# Altium PCB UNO.PcbDoc
Units mil, origin at the board's own origin, x right, y up, seen from the top; angles counter-clockwise.
Board outline 6000 x 4000 mil, 2 copper layers (Top Layer, Bottom Layer), stack 12.8 mil thick; 53 components, 47 nets, 230 pads, 39 vias.
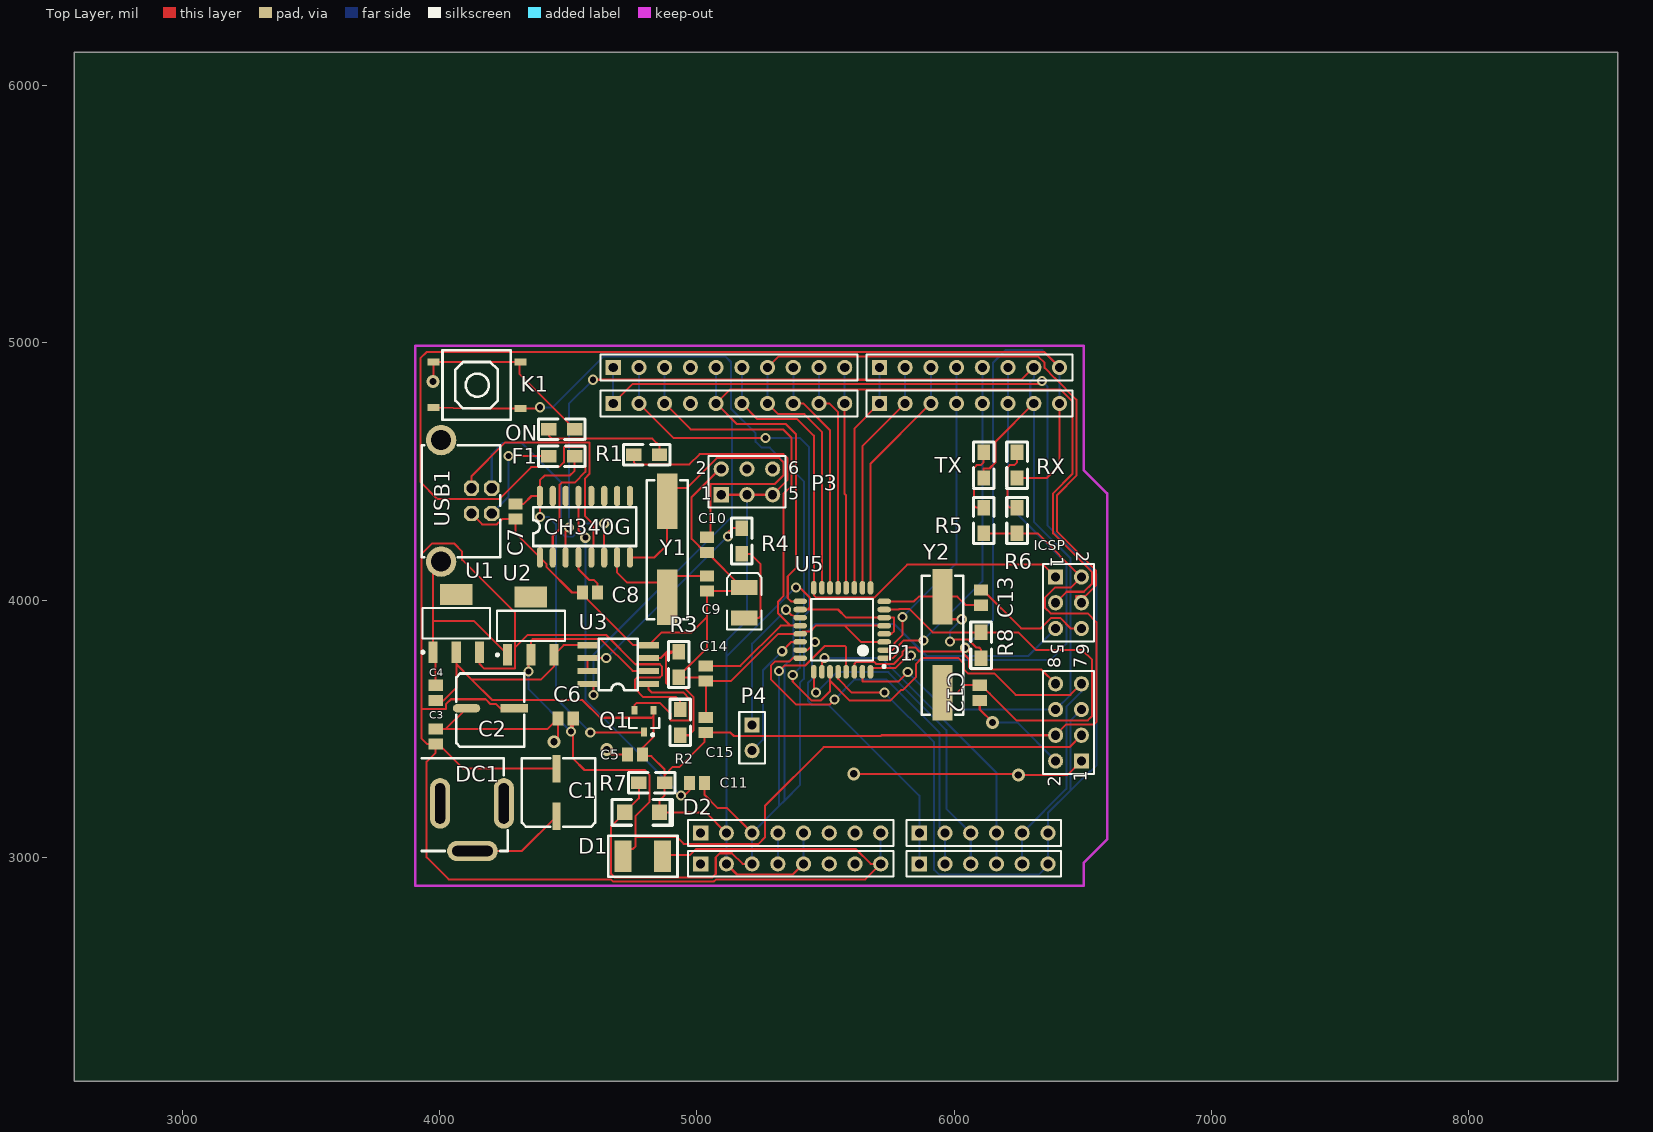
[diagram p0: Top Layer view]
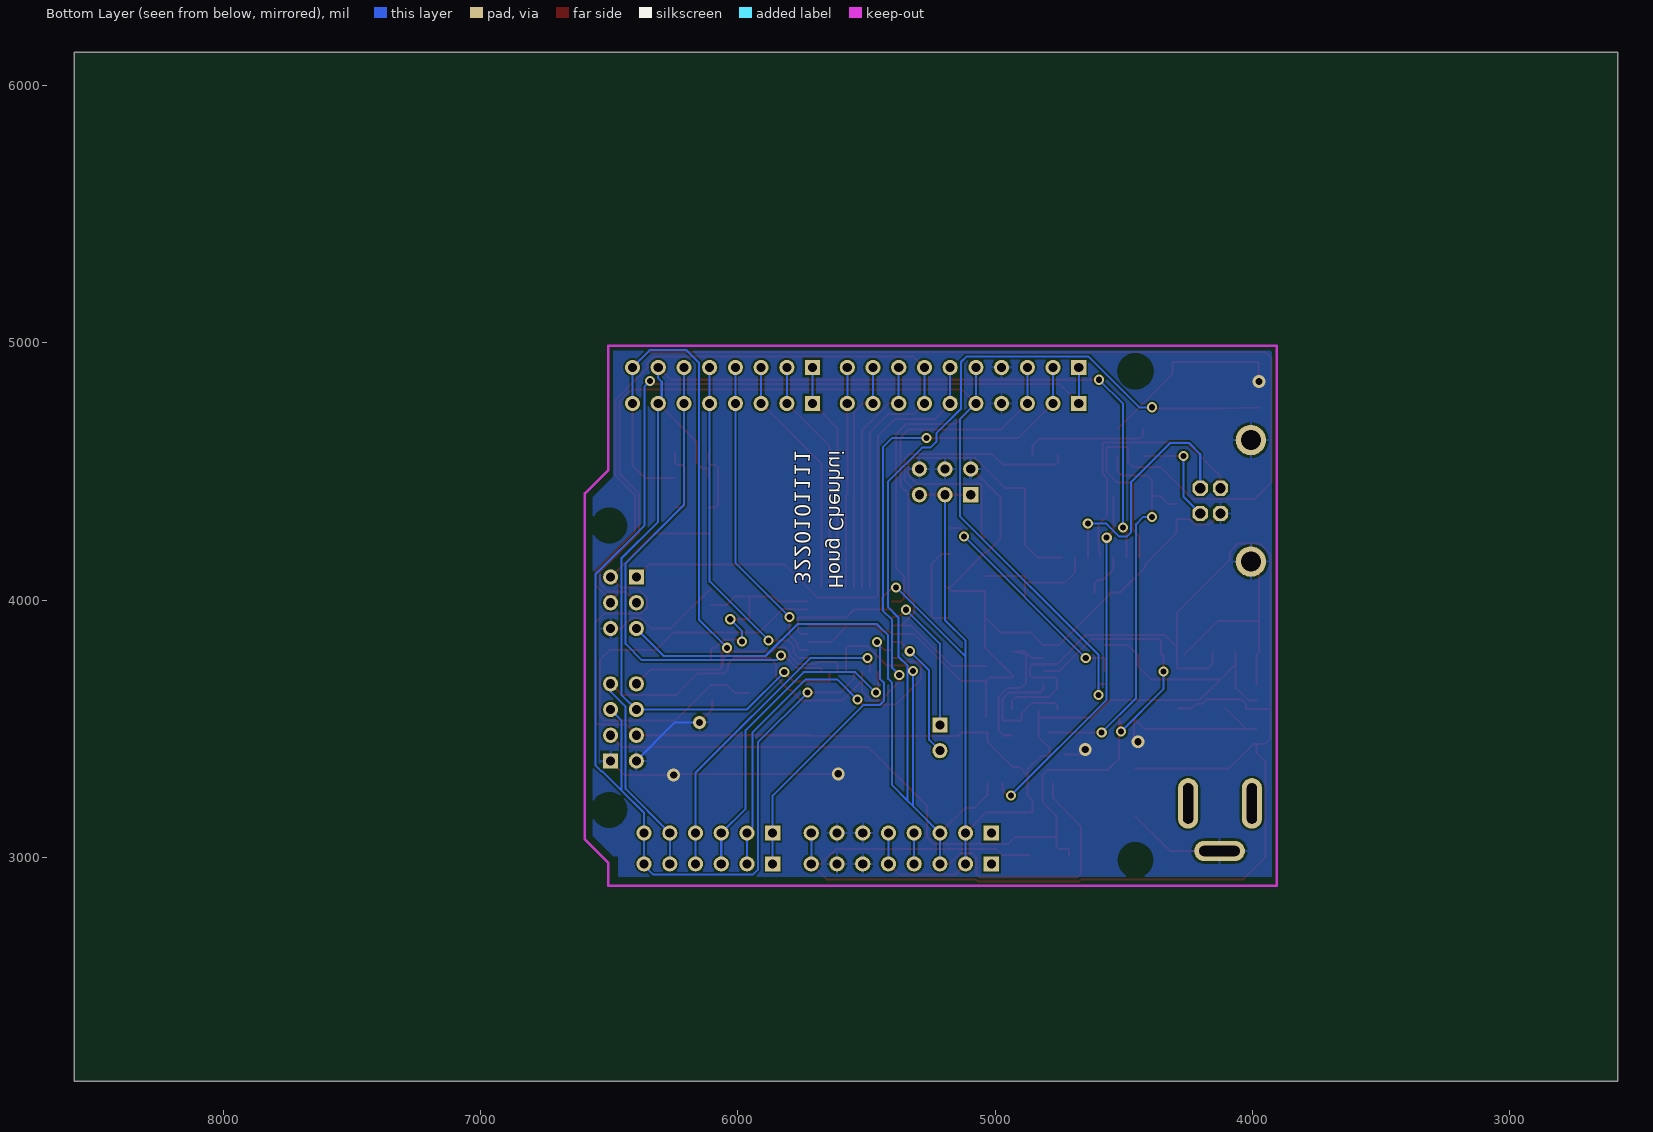
[diagram p1: Bottom Layer view, seen from below]

## Layer stack, top to bottom
Top Solder: solder mask 0.4, Solder Resist, Dk 3.5
Top Layer: signal copper 1.4
Dielectric1: core 10, FR-4, Dk 4.2
Bottom Layer: signal copper 1.4
Bottom Solder: solder mask 0.4, Solder Resist, Dk 3.5

## Board outline
2580,2130 2580,6130 8580,6130 8580,2130

## Design rules (kind name [scope] priority, off if disabled: settings)
AssemblyTestPointUsage AssemblyTestPointUsage_1 [All] p2:
AssemblyTestpoint AssemblyTestpoint_1 [All] p2: testpointundercomponent=TRUE minsize=40 maxsize=100 preferedsize=60 minholesize=0 maxholesize=40 preferedholesize=32 testpointgrid=1 usegrid=TRUE gridtolerance=0.01 allowsidetop=TRUE allowsidebottom=TRUE
Clearance [All] p1: gap=7.87
ComponentClearance ComponentClearance_1 [All] p2: gap=10 collisioncheckmode=3 verticalgap=10 showdistances=FALSE
DiffPairsRouting DiffPairsRouting_1 [All] p2: maxlimit=10 minlimit=10 mostfreqgap=10 toplayer_minwidth=15 toplayer_maxwidth=15 toplayer_prefwidth=15 bottomlayer_minwidth=15 bottomlayer_maxwidth=15 bottomlayer_prefwidth=15 maxuncoupledlength=500
FabricationTestPointUsage TestPointUsage [All] p2: valid=0 allowmultiple=FALSE
FabricationTestpoint Testpoint [All] p2: side=3 testpointundercomponent=TRUE minsize=40 maxsize=100 preferedsize=60 minholesize=0 maxholesize=40 preferedholesize=32 testpointgrid=1 allowsidetop=TRUE allowsidebottom=TRUE usegrid=TRUE gridtolerance=0.01
FanoutControl Fanout_LCC [IsLCC] p1: bgadir=Out bgaviamode=Centered fanoutstyle=Auto fanoutdirection=Alternating viagrid=1 // Fanout_LCC (Default Rule)
FanoutControl Fanout_BGA [IsBGA] p2: bgadir=Out bgaviamode=Centered fanoutstyle=Auto fanoutdirection=Alternating viagrid=1 // Fanout_BGA (Default Rule)
FanoutControl Fanout_Default [All] p4: bgadir=Out bgaviamode=Centered fanoutstyle=Auto fanoutdirection=Alternating viagrid=1 // Fanout_Default (Default Rule)
FanoutControl Fanout_Small [(CompPinCount < 5)] p5: bgadir=Out bgaviamode=Centered fanoutstyle=Auto fanoutdirection=OutThenIn viagrid=1 // Fanout_Small (Default Rule)
FanoutControl Fanout_BGA_1 [IsBGA] p6: bgadir=Out bgaviamode=Centered fanoutstyle=Auto fanoutdirection=Alternating viagrid=1 // Fanout_BGA (Default Rule)
FanoutControl Fanout_LCC_1 [IsLCC] p7: bgadir=Out bgaviamode=Centered fanoutstyle=Auto fanoutdirection=Alternating viagrid=1 // Fanout_LCC (Default Rule)
FanoutControl Fanout_SOIC_1 [IsSOIC] p8: bgadir=Out bgaviamode=Centered fanoutstyle=Auto fanoutdirection=Alternating viagrid=1 // Fanout_SOIC (Default Rule)
FanoutControl Fanout_Small_1 [(CompPinCount < 5)] p9: bgadir=Out bgaviamode=Centered fanoutstyle=Auto fanoutdirection=OutThenIn viagrid=1 // Fanout_Small (Default Rule)
FanoutControl Fanout_Default_1 [All] p10: bgadir=Out bgaviamode=Centered fanoutstyle=Auto fanoutdirection=Alternating viagrid=1 // Fanout_Default (Default Rule)
Height Height_1 [All] p2: minheight=0 maxheight=1000 prefheight=500
HoleSize HoleSize_1 [All] p2: absolutevalues=TRUE maxlimit=100 minlimit=1 maxpercent=80.000 minpercent=20.000
HoleToHoleClearance HoleToHoleClearance_1 [All] p2: gap=10 allowstackedmicrovias=TRUE
LayerPairs LayerPairs_1 [All] p2: enforce=TRUE
MinimumSolderMaskSliver MinimumSolderMaskSliver_1 [All] p2: minsoldermaskwidth=10
NetAntennae NetAntennae_1 [All] p2: netantennaetolerance=0
PasteMaskExpansion PasteMaskExpansion_1 [All] p2: expansion=0
PlaneClearance PlaneClearance_1 [All] p2: clearance=20
PolygonConnect [All] p1: connectstyle=Relief reliefconductorwidth=10 reliefentries=4 polygonreliefangle="90 Angle" airgapwidth=10
PolygonConnect PolygonConnect_1 [All] p2: connectstyle=Relief reliefconductorwidth=10 reliefentries=4 polygonreliefangle="90 Angle" airgapwidth=10
RoutingPriority RoutingPriority_1 [All] p2: routingpriority=0
RoutingTopology RoutingTopology_1 [All] p2: topology=Shortest
RoutingVias [All] p1: holewidth=23.62 width=39.37 viastyle="Through Hole" minholewidth=28 minwidth=50 maxholewidth=28 maxwidth=50
ShortCircuit ShortCircuit_1 [All] p2: allowed=FALSE
SilkToBoardRegionClearance SilkToBoardRegionClearance_1 [All] p2:
SilkToSilkClearance SilkToSilkClearance_1 [All] p2: silktosilkclearance=10
SilkToSolderMaskClearance SilkscreenOverComponentPads [IsPad] p2: minsilkscreentomaskgap=10 clearancetoexposedcopper=TRUE
SolderMaskExpansion [All] p1: expansion=4
SolderMaskExpansion SolderMaskExpansion_1 [All] p2: expansion=4
UnRoutedNet UnRoutedNet_1 [All] p2:
UnpouredPolygon UnpouredPolygon_1 [All] p2:
Width [All] p1: maxlimit=7.87 minlimit=7.87 preferedwidth=7.87
26 further rules are at their usual default settings.

## Components (designator, comment, footprint, x,y, rotation, side; value= is the part's Value field where it differs from the comment)
C1 "25V/47uF 铝电解电容" C_47uF#1 4455,3345 r270 top
C2 "25V/47uF 铝电解电容" C_47uF#2 4290,3580 r180 top
C3 "Cap" C0805 3985,3470 r90 top
C4 "Cap" C0805 3985,3640 r90 top
C5 "Cap" C0805 4760,3400 r0 top
C6 "Cap" C0805 4490,3540 r0 top
C7 "Cap" C0805 4295,4345 r90 top
C8 "Cap" C0805 4585,4030 r0 top
C9 "Cap" C0805 5040,4065 r90 top
C10 "Cap" C0805 5040,4215 r90 top
C11 "Cap" C0805 5000.47,3290 r0 top
C12 "Cap" C0805 6100,3640 r270 top
C13 "Cap" C0805 6105,4010 r90 top
C14 "Cap" C0805 5035,3715 r90 top
C15 "Cap" C0805 5035,3515 r90 top
CH340G "CH340G" SOP-16 4390,4166.5 r90 top
D1 "M7" SMA(DO-214AC) 4790,3005 r0 top
D2 "4148" 1206 4720,3175 r0 top
DC1 "DC" DC_5.5插座 4250,3210.04 r180 top
F1 "500mA" 0805 4425,4560 r0 top
ICSP "ICSP" HDR2X3 6395,4090 r270 top
J1A "POWER" HDR1X8 5015,3095 r0 top
J1B "POWER" HDR1X8 5015,2975 r0 top
J2A "AD_IN" HDR1X6 5865,2975 r0 top
J2B "AD_IN" HDR1X6 5865,3095 r0 top
J3A "DI_PWM" HDR1X8 5710,4905 r0 top
J3B "DI_PWM" HDR1X8 5710,4765 r0 top
J4A "DI_PWM" HDR1X10 4675,4765 r0 top
J4B "DI_PWM" HDR1X10 4675,4905 r0 top
K1 "SW-PB" KEY6x6 3976.42,4926.1 r0 top
ON "RED" 0805 4425,4665 r0 top
P1 "Header 4X2" HDR2X4 6495,3375 r90 top
P3 "POWER" HDR2X3 5095,4410 r0 top
P4 "Header 2" HDR1X2 5215,3515 r270 top
Q1 "FDN340P" SOT23_L 4795,3530 r270 top
R1 "Res2" 0805 4755,4565 r0 top
R2 "Res2" 0805 4935,3475 r90 top
R3 "Res2" 0805 4930,3700 r90 top
R4 "Res2" 0805 5175,4180 r90 top
R5 "Res2" 0805 6115,4360 r270 top
R6 "Res2" 0805 6245,4360 r270 top
R7 "Res2" 0805 4775,3290 r0 top
R8 "Res2" 0805 6105,3775 r90 top
RX "RED" 0805 6245,4575 r270 top
TX "RED" 0805 6115,4575 r270 top
U1 "1117,5.0" SOT223_L 4065,3910 r90 top
U2 "1117,3.3" SOT223_L 4355,3900 r90 top
U3 "LM358" SOP-8 4813.11,3675 r180 top
U5 "mega 328-QFP32" 32A_L 5565,3885 r180 top
USB1 "USB" PN61729 4006,4622.44 r270 top
Y1 "12M" HC_49SMD 4885,4010.98 r90 top
Y2 "16M" HC_49SMD 5955,3640 r90 top
? "BLUE" 3.5X2.8X1.9 5185,3990 r90 top

## Footprints (in the part's own frame and the unit in brackets; to place one, negate y for a bottom-side part, rotate by r counter-clockwise, add the part's x,y. Pads: shape width x height; smd on the part's side, far side on the other; paste and mask are expansions set on the pad)
3.5X2.8X1.9 [mm] "SM LED; 2 C-Bend Leads; Body 3.5 x 2.8 x 1.9 mm, inc leads (LxWxH typ)"
  rect 1.5x2.6 smd: 1(-1.5,0) 2(1.5,0)
  silkscreen extent -2.65,-1.7 2.95,1.7
32A_L [mm] "32-Pin Thin Quad Flat Pack 0.8 mm Pitch, IPC High Density"
  oval 1.35x0.55 smd: 1(-4.15,2.8) 2(-4.15,2) 3(-4.15,1.2) 4(-4.15,0.4) 5(-4.15,-0.4) 6(-4.15,-1.2) 7(-4.15,-2) 8(-4.15,-2.8) 17(4.15,-2.8) 18(4.15,-2) 19(4.15,-1.2) 20(4.15,-0.4) 21(4.15,0.4) 22(4.15,1.2) 23(4.15,2) 24(4.15,2.8)
  oval 0.55x1.35 smd: 9(-2.8,-4.15) 10(-2,-4.15) 11(-1.2,-4.15) 12(-0.4,-4.15) 13(0.4,-4.15) 14(1.2,-4.15) 15(2,-4.15) 16(2.8,-4.15) 25(2.8,4.15) 26(2,4.15) 27(1.2,4.15) 28(0.4,4.15) 29(-0.4,4.15) 30(-1.2,4.15) 31(-2,4.15) 32(-2.8,4.15)
  silkscreen extent -4.28,-3.05 3.05,3.75, body extent -3.5,-3.5 3.5,3.5, height 1.2
0805 [mil]
  rect 60x49.21 smd: 1(0,0) 2(100,0)
  silkscreen extent -40,-40 140,40
1206 [mil]
  rect 60x60 smd: 1(0,0) 2(135,0)
  silkscreen extent -50,-50 185,50
C0805 [mm] "Chip Capacitor, Body 2.0x1.3mm, IPC High Density"
  rect 1.1x1.4 smd: 1(-0.75,0) 2(0.75,0)
  body extent -1.1,-0.72 1.1,0.72, height 1.4
C_47uF#1 [mm]
  rect 2.7x0.8 smd: 0(0,0) 1(4.699,0)
  silkscreen extent -1.02,-3.43 5.72,3.81
C_47uF#2 [mm]
  rect 2.7x0.8 smd: 0(0,0)
  oval 2.7x0.8 smd: 1(4.699,0)
  silkscreen extent -1.02,-3.43 5.72,3.81
DC_5.5插座 [mm]
  oval 2x5 hole 1 slot 4 at 90 deg: 0(0,0) 1(6.3,0)
  oval 5x2 hole 1 slot 4 at 0 deg: 2(3.1,4.7)
  silkscreen extent -0.38,-4.44 8.13,4.7
HC_49SMD [mm]
  rect 5.5x2 smd: 0(0,0) 1(9.5,0)
  silkscreen extent -2.16,-2.03 11.56,2.03
HDR1X2 [mm] "Connector; Header; 2 Position"
  rect 1.5x1.5 hole 0.9: 1(0,0)
  round 1.5 hole 0.9: 2(2.54,0)
  silkscreen extent -1.27,-1.27 3.81,1.27
HDR1X6 [mm] "Connector; Header; 6 Position"
  rect 1.5x1.5 hole 0.9: 1(0,0)
  round 1.5 hole 0.9: 2(2.54,0) 3(5.08,0) 4(7.62,0) 5(10.16,0) 6(12.7,0)
  silkscreen extent -1.27,-1.27 13.97,1.27
HDR1X8 [mm] "Connector; Header; 8 Position"
  rect 1.5x1.5 hole 0.9: 1(0,0)
  round 1.5 hole 0.9: 2(2.54,0) 3(5.08,0) 4(7.62,0) 5(10.16,0) 6(12.7,0) 7(15.24,0) 8(17.78,0)
  silkscreen extent -1.27,-1.27 19.05,1.27
HDR1X10 [mm] "Connector; Header; 10 Position"
  rect 1.5x1.5 hole 0.9: 1(0,0)
  round 1.5 hole 0.9: 2(2.54,0) 3(5.08,0) 4(7.62,0) 5(10.16,0) 6(12.7,0) 7(15.24,0) 8(17.78,0) 9(20.32,0) 10(22.86,0)
  silkscreen extent -1.27,-1.27 24.13,1.27
HDR2X3 [mm] "Connector; Header; 3x2 Position"
  rect 1.5x1.5 hole 0.9: 1(0,0)
  round 1.5 hole 0.9: 2(0,2.54) 3(2.54,0) 4(2.54,2.54) 5(5.08,0) 6(5.08,2.54)
  silkscreen extent -1.27,-1.27 6.35,3.81
HDR2X4 [mm] "Connector; Header; 4x2 Position"
  rect 1.5x1.5 hole 0.9: 1(0,0)
  round 1.5 hole 0.9: 2(0,2.54) 3(2.54,0) 4(2.54,2.54) 5(5.08,0) 6(5.08,2.54) 7(7.62,0) 8(7.62,2.54)
  silkscreen extent -1.27,-1.27 8.89,3.81
KEY6x6 [mm]
  rect 1.2x0.7 smd: 4(0,0) 5(8.6,0) 6(0,-4.5) 7(8.6,-4.6)
  silkscreen extent 0.89,-5.71 7.62,1.14
PN61729 [mm]
  round 3 hole 2: 8(0,0) 9(12,0)
  oct 1.524x1.524 hole 1: 10(4.75,3) 11(7.25,3) 12(4.75,5) 13(7.25,5)
  silkscreen extent 0.51,-1.91 11.56,5.84
SMA(DO-214AC) [mil]
  rect 65.75x122.44 smd: A(-77.36,0) K(77.36,0)
  silkscreen extent -135,-80 135,80
SOP-8 [mm]
  rect 2x0.6 smd: 1(0,0) 2(0,-1.27) 3(0,-2.54) 4(0,-3.81) 5(6.048,-3.81) 6(6.048,-2.54) 7(6.048,-1.27) 8(6.048,0)
  silkscreen extent 1.1,-4.44 4.94,0.64
SOP-16 [mil]
  oval 80x24 smd: 1(0,0) 2(0,-50) 3(0,-100) 4(0,-150) 5(0,-200) 6(0,-250) 7(0,-300) 8(0,-350) 9(238.5,-350) 10(238.5,-300) 11(238.5,-250) 12(238.5,-200) 13(238.5,-150) 14(238.5,-100) 15(238.5,-50) 16(238.5,0)
  silkscreen extent 44,-375 194,25
SOT23_L [mm] "SOT23, 3-Leads, Body 2.9x1.3mm, Pitch 0.95mm, Lead Span 2.3mm - Reverse Pinning, IPC High Density"
  rect 0.85x0.6 smd: 1(1.075,0) 2(-1.075,-0.95) 3(-1.075,0.95)
  silkscreen extent -0.3,-1.5 1.47,1.5, body extent -0.7,-1.5 0.7,1.5, height 1.1
SOT223_L [mm] "SOT223, 4-Leads, Body 6.5x3.5mm, Pitch 2.3mm, Lead Span 7mm, IPC High Density"
  rect 2.1x0.9 smd: 1(-2.85,2.3) 2(-2.85,0) 3(-2.85,-2.3)
  rect 2.1x3.2 smd: 4(2.85,0)
  silkscreen extent -2.97,-3.35 1.5,3.42, body extent -1.85,-3.35 1.85,3.35, height 1.7

## Part data
C1 C2: library part "Cap Pol1", "Polarized Capacitor (Radial)"
C3 C4 C5 C6 C7 C8 C9 C10 C11 C12 C13 C14 C15: "Capacitor"
D1 D2: library part "Diode 1N4148", "High Conductance Fast Diode"
F1: library part "Fuse 1", "Fuse"
J1A J1B J3A J3B: library part MHDR1X8, "Header, 8-Pin"
J2A J2B: library part MHDR1X6, "Header, 6-Pin"
J4A J4B: library part MHDR1X10, "Header, 10-Pin"
K1: "Switch"
ON RX TX: library part LED2, "Typical RED, GREEN, YELLOW, AMBER GaAs LED"
P1: "Header, 4-Pin, Dual row"
P4: "Header, 2-Pin"
Q1: library part MOSFET-P, "P-Channel MOSFET"
R1 R2 R3 R4 R5 R6 R7 R8: "Resistor"
U1 U2: library part LM1117
U5: library part QFP-32
Y1 Y2: library part XTAL, "Crystal Oscillator"
?: library part LED3, "Typical BLUE SiC LED"

## Via types
v1: diameter 39.37, hole 23.62, Top Layer to Bottom Layer, 33 vias
v2: diameter 50, hole 28, Top Layer to Bottom Layer, 6 vias

## Nets (pads, with @x,y where several pads share a name; then routed paths per layer and width w, separated by ;. In a path a pad name is that pad's centre, name@x,y a point inside that pad or via, vN(x,y) a via of type N, cw(c..) or ccw(c..) an arc to the next point about the centre after c; other vN are vias at no path point)
+3V3: J1A.4 J1B.4 | length 120
  Bottom Layer w7.87: J1B.4 J1A.4
A0: J2A.1 J2B.1 U5.23 | length 1160.9
  Top Layer w7.87: U5.23 5429.26,3806.26 v1(5460,3837)
  Bottom Layer w7.87: v1(5460,3837) 5448,3825 5448,3694.18 5432,3678.18 5432,3610 5449.67,3592.33 5512.5,3592.33 5865,3239.82 J2B.1 J2A.1
A1: J2A.2 J2B.2 U5.24 | length 1520.2
  Top Layer w7.87: U5.24 5373.76,3774.76 5361.24,3762.24 5305.24,3762.24 5288,3745 5288,3692 5386.24,3593.76 5515.76,3593.76 v1(5536,3614)
  Bottom Layer w7.87: v1(5536,3614) 5614,3692 5736,3692 5944,3484 5944,3116 J2B.2 J2A.2
A2: J2A.3 J2B.3 U5.25 | length 1275.9
  Top Layer w7.87: U5.25 5454.76,3650.24 v1(5464,3641)
  Bottom Layer w7.87: v1(5464,3641) 5543.24,3720.24 5744.75,3720.24 5970,3494.99 5970,3190 J2B.3 J2A.3
A3: J2A.4 J2B.4 U5.26 | length 1265.2
  Top Layer w7.87: U5.26 5486.26,3765.26 v1(5496,3775)
  Bottom Layer w7.87: v1(5496,3775) 5719,3775 6165,3329 J2B.4 J2A.4
A4/SDA: J2A.5 J2B.5 J4A.2 J4B.2 P1.7 U5.27 | length 4068.9
  Top Layer w7.87: J4A.2 4909,4631 v1(5267,4631) ; v1(5372.95,3709.68) 5372.95,3683.56 5447,3609.5 5481,3609.5 5517.76,3646.26 5517.76,3686.24 ; U5.27 5517.76,3686.24 ; P1.7 6452.09,3632.09 6239.91,3632.09 6157.85,3714.15 6056,3714.15 6038.25,3731.9 6038.25,3753.75 6016.17,3775.83 5875.54,3775.83 5851.5,3751.78 5851.5,3701 5800.91,3650.41 5793.38,3650.41 5752.47,3609.5 5594.5,3609.5 5517.76,3686.24
  Bottom Layer w7.87: J4A.2 J4B.2 ; v1(5267,4631) 5400,4631 5436.95,4594.05 5436.95,3959.7 5400.63,3923.39 5400.63,3737.36 v1(5372.95,3709.68) ; J2A.5 J2B.5 6436.34,3266.34 6436.34,3585.34 6495,3644 P1.7
A5/SCL: J2A.6 J2B.6 J4A.1 J4B.1 P1.5 U5.28 | length 5690.4
  Top Layer w7.87: J4A.1 4751,4841 6331,4841 v1(6342,4852) ; U5.28 5549.25,3693.98 5602.23,3641 v1(5729,3641)
  Bottom Layer w7.87: J4A.1 J4B.1 ; v1(5729,3641) 5923,3447 5923,2952 5942,2933 6330,2933 6365,2968 J2A.6 J2B.6 6365,3172.73 6452.09,3259.82 ; v1(6342,4852) 6363,4831 6363,4292 6553,4102 6553,3357.24 6529.42,3333.66 6525.93,3333.66 6452.09,3259.82 ; P1.5 6452.09,3532.09 6452.09,3259.82
A6: P4.1 U5.19 | length 567.4
  Top Layer w7.87: v1(5347,3963) 5368,3942 U5.19
  Bottom Layer w7.87: P4.1 5215,3831 v1(5347,3963)
A7: P4.2 U5.22 | length 519.7
  Top Layer w7.87: v1(5332,3801.76) 5368,3837.76 U5.22
  Bottom Layer w7.87: P4.2 5257,3457 5257,3726.76 v1(5332,3801.76)
AREF: C14.2 J4A.3 J4B.3 U5.20 | length 1892.4
  Top Layer w7.87: J4A.3 4976,4664 5335,4664 5368.5,4630.5 5368.5,4445.47 5337.76,4414.73 5337.76,4016.53 5315.5,3994.28 5315.5,3949.5 5364.25,3900.75 ; C14.2 5169.53,3744.53 5325.75,3900.75 5364.25,3900.75 ; U5.20 5364.25,3900.75
  Bottom Layer w7.87: J4A.3 J4B.3
D2: J3A.6 J3B.6 U5.32 | length 1998.9
  Top Layer w7.87: U5.32 5675.24,3736.25 5771.62,3736.25 5820.37,3785 v1(5832,3785)
  Bottom Layer w7.87: v1(5832,3785) 5849.69,3767.31 6374.31,3767.31 6437,3830 6437,4143 6210,4370 J3B.6 J3A.6
D3: J3A.5 J3B.5 U5.1 | length 1352.5
  Top Layer w7.87: U5.1 5761.76,3774.76 5784.76,3797.76 5784.76,3824 5804.76,3844 v1(5881,3844)
  Bottom Layer w7.87: v1(5881,3844) 6110,4073 J3B.5 J3A.5
D4: J3A.4 J3B.4 U5.2 | length 1233.9
  Top Layer w7.87: U5.2 5760,3806.26 5769.01,3815.27 5769.01,3834.27 5799,3864.26 v1(5799,3934)
  Bottom Layer w7.87: v1(5799,3934) 6010,4145 J3B.4 J3A.4
D5: J3A.3 J3B.3 U5.9 | length 953.9
  Top Layer w7.87: U5.9 5675.24,4530.24 J3B.3
  Bottom Layer w7.87: J3B.3 J3A.3
D6: J3A.2 J3B.2 U5.10 | length 925.5
  Top Layer w7.87: U5.10 5643.74,4598.74 J3B.2
  Bottom Layer w7.87: J3B.2 J3A.2
D7: J3A.1 J3B.1 U5.11 | length 897.1
  Top Layer w7.87: U5.11 5612.24,4667.24 J3B.1
  Bottom Layer w7.87: J3B.1 J3A.1
D8: J4A.10 J4B.10 U5.12 | length 859
  Top Layer w7.87: J4A.10 5575,4412.75 5580.75,4407 U5.12
  Bottom Layer w7.87: J4A.10 J4B.10
D9: J4A.9 J4B.9 U5.13 | length 910.4
  Top Layer w7.87: J4A.9 5514.34,4765 5549.25,4730.08 U5.13
  Bottom Layer w7.87: J4A.9 J4B.9
D10/SS: J4A.8 J4B.8 U5.14 | length 938
  Top Layer w7.87: J4A.8 5413,4765 5517.76,4660.24 U5.14
  Bottom Layer w7.87: J4A.8 J4B.8
D11/MOSI: ICSP.4 J4A.7 J4B.7 U5.15 | length 3248.1
  Top Layer w7.87: J4A.7 5317,4723 5417.91,4723 5486.26,4654.65 U5.15 ; J4B.7 5317,4947 6328,4947 6352,4923 6352,4903 6392,4863 6392.73,4863 6475.75,4779.98 6475.75,4483.98 6400.75,4408.98 6400.75,4266.52 6552.75,4114.52 6552.75,4058.48 6511.44,4017.16 6475,4017.16 6475,4010 ICSP.4
  Bottom Layer w7.87: J4A.7 J4B.7
D12/MISO: ICSP.1 J4A.6 J4B.6 U5.16 | length 2109
  Top Layer w7.87: J4A.6 5236,4704 5390.33,4704 5454.76,4639.56 U5.16 5454.76,4019.24 5464,4010 5690,4010 5818,4138 6347,4138 ICSP.1
  Bottom Layer w7.87: J4A.6 J4B.6
D13/SCK: ICSP.3 J4A.5 J4B.5 U3.8 U5.17 | length 5054.3
  Top Layer w7.87: U3.8 4598,3675 v1(4598,3632) ; U5.17 5366.27,3995.24 5353.5,4008 5353.5,4093 5385,4124.5 5385,4646 5346,4685 5155,4685 J4A.5 5130,4820 6413.46,4820 6460,4773.46 6460,4490.5 6385,4415.5 6385,4260 6537,4108 6537,4065 6504.91,4032.91 6437.91,4032.91 ICSP.3
  Bottom Layer w7.87: v1(4598,3632) 4598,3787 5137,4326 5137,4703 J4A.5 J4B.5
D+: CH340G.5 USB1.10 | length 1025.4
  Top Layer w7.87: USB1.10 4124.11,4482.11 4254.17,4612.17 4582.56,4612.17 4582.56,4490.56 4566,4474 4566,4326.49 4597.99,4294.5 4597.99,4219.5 CH340G.5
D-: CH340G.6 USB1.12 | length 1005.7
  Top Layer w7.87: CH340G.6 v1(4640,4298)
  Bottom Layer w7.87: USB1.12 4202.85,4568 4245.85,4611 4320,4611 4471.5,4459.5 4471.5,4263.5 4488,4247 4517,4247 4568,4298 v1(4640,4298)
GND: ?.2 C1.1 C2.1 C3.2 C4.2 C5.1 C6.1 C7.1 C8.1 C9.1 C10.1 C12.2 C13.2 C14.1 C15.2 CH340G.1 DC1.2 ICSP.6 J1A.6 J1A.7 J1B.6 J1B.7 J4A.4 J4B.4 K1.4 K1.5 ON.2 P1.1 P1.2 P3.2 P3.4 P3.6 R3.1 U1.1 U2.1 U3.4 U5.3 U5.5 U5.21 USB1.8 USB1.9 USB1.11 | length 8170.7
  Top Layer w7.87: v2(3975,4850) 3976.42,4851.42 K1.4 4310,4926.1 4310,4880 ON.2 ; C3.2 4024.53,3499.53 ; C4.2 3985,3787.24 U1.1 3974.45,3920 ; USB1.9 3974.45,4118.45 3974.45,3920 ; C2.1 4024.53,3499.53 ; USB1.11 4165.92,4295.19 4222.74,4295.19 4243.02,4315.47 C7.1 4295,4261.5 CH340G.1 4416.19,4140.31 4416.19,4128.63 4514.82,4030 C8.1 4555.47,4023.14 4753.61,3825 U3.4 4863.11,3875 4980,3875 5040,3935 ; DC1.2 4320,3025 C1.1 ; U2.1 4132.24,3920 3974.45,3920 ; v2(4445,3450) 4460.47,3465.47 C6.1 4420,3499.53 4024.53,3499.53 ; v2(4650,3420) 4670,3400 C5.1 ; C15.2 C14.1 ; P3.2 5088.73,4510 4980,4401.27 4980,4238.61 5033.14,4185.47 C10.1 5176.42,4049.06 ?.2 5171.42,4035.47 C9.1 5040,3935 ; v2(5610,3325) 6245,3325 v2(6250,3320) 6440,3320 P1.1 ; U5.3 5637.99,3837.76 5575,3900.75 ; U5.5 5575,3900.75 ; C12.2 6100,3575 v2(6150,3525) ; C13.2 6111.86,4039.53 6260.64,3890.75 6337.29,3890.75 6377.88,3931.34 6412.12,3931.34 6453.46,3890 ICSP.6 ; C14.1 5020.47,3700 R3.1 4930,3705.44 5040,3815.44 5040,3935 ; C14.1 5132.74,3685.47 5316.52,3869.25 U5.21 5410.47,3878.11 5440,3878.11 5462.64,3900.75 5575,3900.75
  Bottom Layer w7.87: v2(6150,3525) 6245,3525 P1.2
Net_1: ?.1 R4.1 | length 356.9
  Top Layer w7.87: R4.1 5208,4180 5248,4140 5248,3938.94 5240,3930.94 ?.1
NetC8_2: C8.2 CH340G.4 | length 178.5
  Top Layer w7.87: CH340G.4 4540,4120 4581,4079 4600,4079 4614.53,4064.47 C8.2
NetC9_2: C9.2 CH340G.7 Y1.0 | length 508.8
  Top Layer w7.87: CH340G.7 4690,4107 4728,4069 Y1.0@4885,4069 ; Y1.0 Y1.0@4885,4069 ; C9.2 4885,4094.53 Y1.0@4885,4069
NetC10_2: C10.2 CH340G.8 Y1.1 | length 1462
  Top Layer w7.87: CH340G.8 4740,4166 4835,4166 4885,4216 Y1.1 4885,4436 4961,4436 5077,4552 5321,4552 5337,4536 5337,4485 5304,4452 5053,4452 5053,4244.53 C10.2
NetC11_1: C11.1 CH340G.13 | length 1399.2
  Top Layer w7.87: CH340G.13 4540,4269.5 v1(4566.5,4243) ; v1(4939.06,3240.94) 4952,3240.94 4970.94,3259.89 C11.1
  Bottom Layer w7.87: v1(4566.5,4243) 4566.5,3613.5 v1(4939.06,3240.94)
NetC12_1: C12.1 R8.2 U5.7 Y2.0 | length 1768.4
  Top Layer w7.87: U5.7 5785.7,3963.74 5788.1,3966.13 5825.9,3966.13 5917.03,3875 R8.2 6250,3875 6319,3806 6499,3806 6537,3768 6537,3550 6520,3533 6242.47,3533 6139.37,3636.1 6139.37,3637.02 6106.39,3670 6042,3670 6012,3640 Y2.0
NetC13_1: C13.1 R8.1 U5.8 Y2.1 | length 838
  Top Layer w7.87: U5.8 5844.43,3995.24 5863.21,4014.02 Y2.1 ; v1(5985,3840) 5992,3847 6056,3847 6087,3816 6097,3816 6105,3808 R8.1 ; v1(6030,3926) 5955,3926 Y2.1 ; C13.1 6046.54,3980.47 6013,4014.02 Y2.1
  Bottom Layer w7.87: v1(5985,3840) 5985,3881 v1(6030,3926)
NetD1_1: DC1.1
NetF1_1: F1.1 USB1.13 | length 407
  Top Layer w7.87: v1(4268,4560) F1.1
  Bottom Layer w7.87: USB1.13 4268,4402.16 v1(4268,4560)
NetON_1: ON.1 R1.2 | length 506.6
  Top Layer w7.87: ON.1 4425,4640 4437.09,4627.91 4827.09,4627.91 4855,4600 R1.2
NetQ1_2: Q1.2 U3.1 | length 560.2
  Top Layer w7.87: Q1.2 4757.6,3592 4766.6,3601 4856,3601 4898,3559 4898,3533 4971.42,3533 4971.42,3617 4946.67,3641.75 4824,3641.75 4813,3652.75 4813,3675 U3.1
NetR2_1: R2.1 R3.2 U3.3 | length 609.7
  Top Layer w7.87: U3.3 4859,3775 4884,3800 R3.2 4880,3789.19 4880,3749.27 4880.75,3748.52 4880.75,3702.48 4880,3701.73 4880,3678.69 4900.69,3658 4952.69,3658 4988,3622.69 4988,3495 4968,3475 R2.1
NetR4_2: R4.2 U3.6 U3.7 | length 868.6
  Top Layer w7.87: U3.7 U3.6 v1(4648,3775) ; v1(5121,4248) 5121,4264 5137,4280 R4.2
  Bottom Layer w7.87: v1(4648,3775) v1(5121,4248)
NetR5_1: R5.1 TX.1 | length 272
  Top Layer w7.87: R5.1 6086,4360 6078,4368 6078,4515 6088,4525 6104,4525 6115,4536 TX.1
NetR6_1: R6.1 RX.1 | length 273.2
  Top Layer w7.87: R6.1 6216,4360 6208,4368 6208,4517 6216,4525 6234,4525 6245,4536 RX.1
RESET: C11.2 D2.1 ICSP.5 J1A.3 J1B.3 K1.6 K1.7 R7.1 U5.29 | length 7455.6
  Top Layer w7.87: K1.6@3970.08,4748.51 3971.43,4748.48 3976.41,4748.37 3981.06,4748.26 4124.94,4745 K1.7 4385,4745 v1(4390,4750) ; R7.1 4775,3230 D2.1 4667,3122 4667,2936 4680.44,2922.56 5060.22,2922.56 5073.66,2936 5073.66,3000 5090,3016.34 5136.66,3016.34 5178,2975 J1B.3 ; C11.2 5030,3243 5080,3193 5117,3193 J1A.3 ; v1(5320.15,3725.19) 5341.45,3746.5 5422.5,3746.5 5498.5,3822.5 5575.5,3822.5 5580.75,3817.24 U5.29
  Bottom Layer w7.87: v1(4390,4750) 4440,4750 4637,4947 5112,4947 5133,4926 5133,4744 5228.56,4648.44 5228.56,4616 5251.74,4592.82 5284.18,4592.82 5417,4460 5417,3973.82 5375.77,3932.59 5375.77,3780.82 5341.45,3746.5 5341.45,3221.45 ; J1B.3 J1A.3 5320.15,3200.15 ; v1(5320.15,3725.19) 5320.15,3200.15 ; ICSP.5 6288.06,3783.06 5892.94,3783.06 5768.36,3907.64 5460.02,3907.64 5416.38,3864 5416.38,3693.93 5400.76,3678.31 5400.76,3280.76 5341.45,3221.45 ; 5320.15,3200.15 5341.45,3221.45
RXD: CH340G.2 J3A.8 J3B.8 P1.8 RX.2 U5.30 | length 7354.6
  Top Layer w7.87: CH340G.2 4440,4249 4466,4275 4466,4448 4475,4457 4524.81,4457 4566.81,4499 4566.81,4596.42 4483,4596.42 4483,4536 4464,4517 4356,4517 4232,4393 3992,4393 3925,4460 3925,4940 3950,4965 6350,4965 J3A.8 ; U5.30 5612.24,3752 5620.24,3760 5690,3760 5698,3752 5765.1,3752 5800.5,3787.41 5800.5,3800 5817,3816.5 5848.48,3816.5 5863.79,3801.19 6028.07,3801.19 6058.19,3771.06 6058.19,3740.81 6069,3730 6072,3730 ; v1(6042,3815) 6063,3794 6063,3739 6072,3730 ; RX.2 6360,4475 6410,4525 J3B.8 ; P1.8 6340,3730 6072,3730
  Bottom Layer w7.87: v1(6042,3815) 6152,3925 6152,4924 6200,4972 6343,4972 J3A.8 J3B.8
TXD: CH340G.3 J3A.7 J3B.7 P1.6 TX.2 U5.31 | length 5142
  Top Layer w7.87: CH340G.3 4490,4269 v1(4503,4282) ; v1(4597,4857) 6262,4857 J3A.7 ; U5.31 5643.74,3683.23 5782.72,3683.23 v1(5820,3720.5) ; TX.2 6115,4512 6138,4512 6162,4536 6162,4617 J3B.7
  Bottom Layer w7.87: v1(4503,4282) 4503,4763 v1(4597,4857) ; v1(5820,3720.5) 5965.5,3575 P1.6 6453,3633 6453,4162 6310,4305 J3B.7 6296.25,4778.75 6296.25,4849.35 6310,4863.09 J3A.7
USB5V: C7.2 CH340G.16 F1.2 Q1.1 | length 1606.2
  Top Layer w7.87: C7.2 4327,4374.53 4357.47,4405 CH340G.16 ; v1(4390,4324) CH340G.16 ; F1.2 4525,4504 4505,4484 4408,4484 4390,4466 CH340G.16 ; v1(4586,3486) 4795,3486 Q1.1
  Bottom Layer w7.87: v1(4390,4324) 4424.11,4324 4452.11,4296 4452.11,3619.89 v1(4586,3486)
VCC3V: C6.2 D1.A P1.3 U2.2 U3.2 | length 3845
  Top Layer w7.87: v1(4345,3723) 4345,3787.8 U2.2 4355,3842 4362,3849 4627,3849 4751,3725 U3.2 ; v1(4511,3489) 4511,3525.47 C6.2@4519.53,3534 ; C6.2 C6.2@4519.53,3534 ; D1.A 4712.64,3033 4752,3033 4762,3043 4762,3080 ; P1.3 6449,3429 5493,3429 5265,3201 5265,3078 5240,3053 4949,3053 4922,3080 4762,3080 ; C6.2@4519.53,3534 4519.53,3384 4563.53,3340 4797,3340 4817,3320 4817,3217 4762,3162 4762,3080
  Bottom Layer w7.87: v1(4345,3723) 4345,3655 v1(4511,3489)
VCC5V: C4.1 C5.2 C15.1 D2.2 ICSP.2 J1A.2 J1A.5 J1B.2 J1B.5 P1.4 P3.1 P3.3 P3.5 Q1.3 R1.1 R5.2 R6.2 R7.2 U1.2 U2.3 U3.5 U5.4 U5.6 U5.18 | length 9388.3
  Top Layer w7.87: C4.1 4016,3610.47 4065,3659.47 4065,3752 ; U1.2 4065,3752 ; U3.5 4482.76,3825 U2.3 4445.55,3744 4393.06,3691.5 4125.5,3691.5 ; R1.1 4755,4536 4763,4528 4971,4528 5011,4568 5336.75,4568 5352.75,4552 5352.75,4467.75 P3.5 P3.3 P3.1 ; Q1.3 4832.4,3551.4 ; J1B.2 5156.34,2933.66 5373.66,2933.66 J1B.5 ; J1A.2 5035,3175 D2.2 4855,3222 4875,3242 R7.2 4875,3320 ; v1(5385,4050) 5385.25,4049.75 5399.25,4049.75 5440,4009 5440,3971.74 5432,3963.74 ; U5.18 5432,3963.74 ; U5.4 5756.25,3869.25 5767,3880 5767,3932.24 U5.6 5580.5,3932.24 5549,3963.74 5432,3963.74 ; R5.2 R6.2 6325,4260 ICSP.2 6453.66,4048.66 6392,4048.66 6353,4009.66 6353,3971.66 6376,3948.66 6519.34,3948.66 6553,3915 6553,3526 6544,3517 6437,3517 P1.4 5718,3475 5715,3472 5144.47,3472 5131,3485.47 C15.1 5029,3485.47 5029,3448 4933,3352 4907,3352 4875,3320 ; 4065,3752 4125.5,3691.5 ; 4125.5,3691.5 4205,3612 4554.98,3612 4623.98,3543 4824,3543 4832.4,3551.4 ; 4832.4,3551.4 4832.4,3469.87 4789.53,3427 C5.2 4789.53,3394 4823,3394 4875,3342 4875,3320
  Bottom Layer w7.87: J1B.2 J1A.2 5115,3780 ; P3.3 5195,3922 5115,3842 5115,3780 ; v1(5385,4050) 5115,3780 ; J1B.5 J1A.5
VIN: C1.0 C2.0 C3.1 D1.K J1A.8 J1B.8 R2.2 U1.3 | length 6956.8
  Top Layer w7.87: U1.3 4155.55,3752 4173.55,3734 4294,3734 4294,3817 ; C2.0 4236,3580 4220,3596 4198,3596 4179,3615 4044.37,3615 4024.37,3595 4024.37,3577 3929,3577 ; C1.0 4092.47,3345 3997,3440.47 C3.1 ; D1.K 4867.36,3010 4974,3010 4996.09,3032.09 5618.91,3032.09 5676,2975 J1B.8 5655,2915 5074.93,2915 5066.74,2906.81 4673.92,2906.81 4665.73,2915 4035,2915 3950,3000 3950,3372 3985,3407 C3.1 ; R2.2 4935,3608 4920,3623 4792,3623 4760,3655 4760,3692 4768,3700 4856,3700 4865,3709 4865,3742 4856,3751 4761,3751 4647,3865 4342,3865 4294,3817 ; 3929,3577 3929,4178 3972,4221 4056,4221 4088,4189 4088,4157 4294,3951 4294,3817 ; 3929,3577 3929,3464 3952.53,3440.47 C3.1
  Bottom Layer w7.87: J1B.8 J1A.8
pads on no net: CH340G.9 CH340G.10 CH340G.11 CH340G.12 CH340G.14 CH340G.15 DC1.0 J1A.1 J1B.1 U1.4 U2.4

## Polygon pours and split planes (outlines as drawn)
GND on Bottom Layer "Bottom Layer-No Net" (solid, pour order 4): 3925,4965 3930,4970 6485,4970 6485,4480 6565,4400 6565,4390 6565,3085 6485,3005 6465,3005 6465,2930 6470,2925 3925,2925

## Keep-outs
Keep-Out Layer:
  lines w10: 3905,2890 6505,2890 6505,2980 6595,3070 6595,4415 6505,4505 6505,4990 3905,4990 3905,2890

## Silkscreen, mask and mechanical layers (free items; w line width, h text height)
Bottom Overlay:
  text "3220101111" at 5780,4060 h60 r90
  text "Hong Chenhui" at 5645,4045 h55 r90
Mechanical 1:
  circle w10: c4455,2990 r62.5
  circle w10: c4455,4890 r62.5
  circle w10: c6500,4290 r62.5
  circle w10: c6500,3185 r62.5
Mechanical 16:
  drawing of 1874 lines, arcs and shapes, not listed
  text "1" at 1427,7465 h70
  text "2" at 4287,7465 h70
  text "3" at 7167,7465 h70
  text "4" at 10037,7465 h70
  text "A" at 75,6559 h70
  text "A" at 11375,6559 h70
  text "C" at 5230,6046.53 h70
  text "B" at 75,4667 h70
  text "B" at 11375,4667 h70
  text "C" at 75,2757 h70
  text "ENGINEER:" at 6850,1300 h45
  text "TITLE:" at 8350,1300 h45
  text "PCB DESIGNER:" at 6850,1005 h45
  text "D" at 75,867 h70
  text "D" at 11375,867 h70
  text "DATE:" at 6850,700 h45
  text "PART NO.:" at 8350,700 h45
  text "REV:" at 10450,700 h45
  text "Altium Limited" at 5550,600 h70
  text ".PRINT_DATE" at 6900,580 h70
  text "12a Rodborough Rd" at 5550,500 h70
  text "Frenchs Forest" at 5550,400 h70
  text "FILE NAME:" at 6850,400 h45
  text "DWG NO:" at 8350,400 h45
  text "SCALE:" at 10450,400 h45
  text "NSW 2086" at 5550,300 h70
  text ".PCB_FILE_NAME_NO_PATH" at 6900,280 h70
  text "1" at 1427,65 h70
  text "2" at 4287,65 h70
  text "3" at 7167,65 h70
  text "4" at 10037,65 h70

## Text inside footprints (layer, text, board x,y; h text height)
ICSP: Top Overlay "1" at 6375,4170 h50 r270; Top Overlay "2" at 6475,4190 h50 r270; Top Overlay "5" at 6375,3830 h50 r270; Top Overlay "6" at 6475,3830 h50 r270
P1: Top Overlay "8" at 6415,3735 h50 r90; Top Overlay "7" at 6515,3735 h50 r90; Top Overlay "1" at 6515,3295 h50 r90; Top Overlay "2" at 6415,3275 h50 r90
P3: Top Overlay "1" at 5015,4390 h50; Top Overlay "2" at 4995,4490 h50; Top Overlay "5" at 5355,4390 h50; Top Overlay "6" at 5355,4490 h50